# EAGLE board PFCEDU.V4 (EAGLE 9.5.0), part 1 of 2
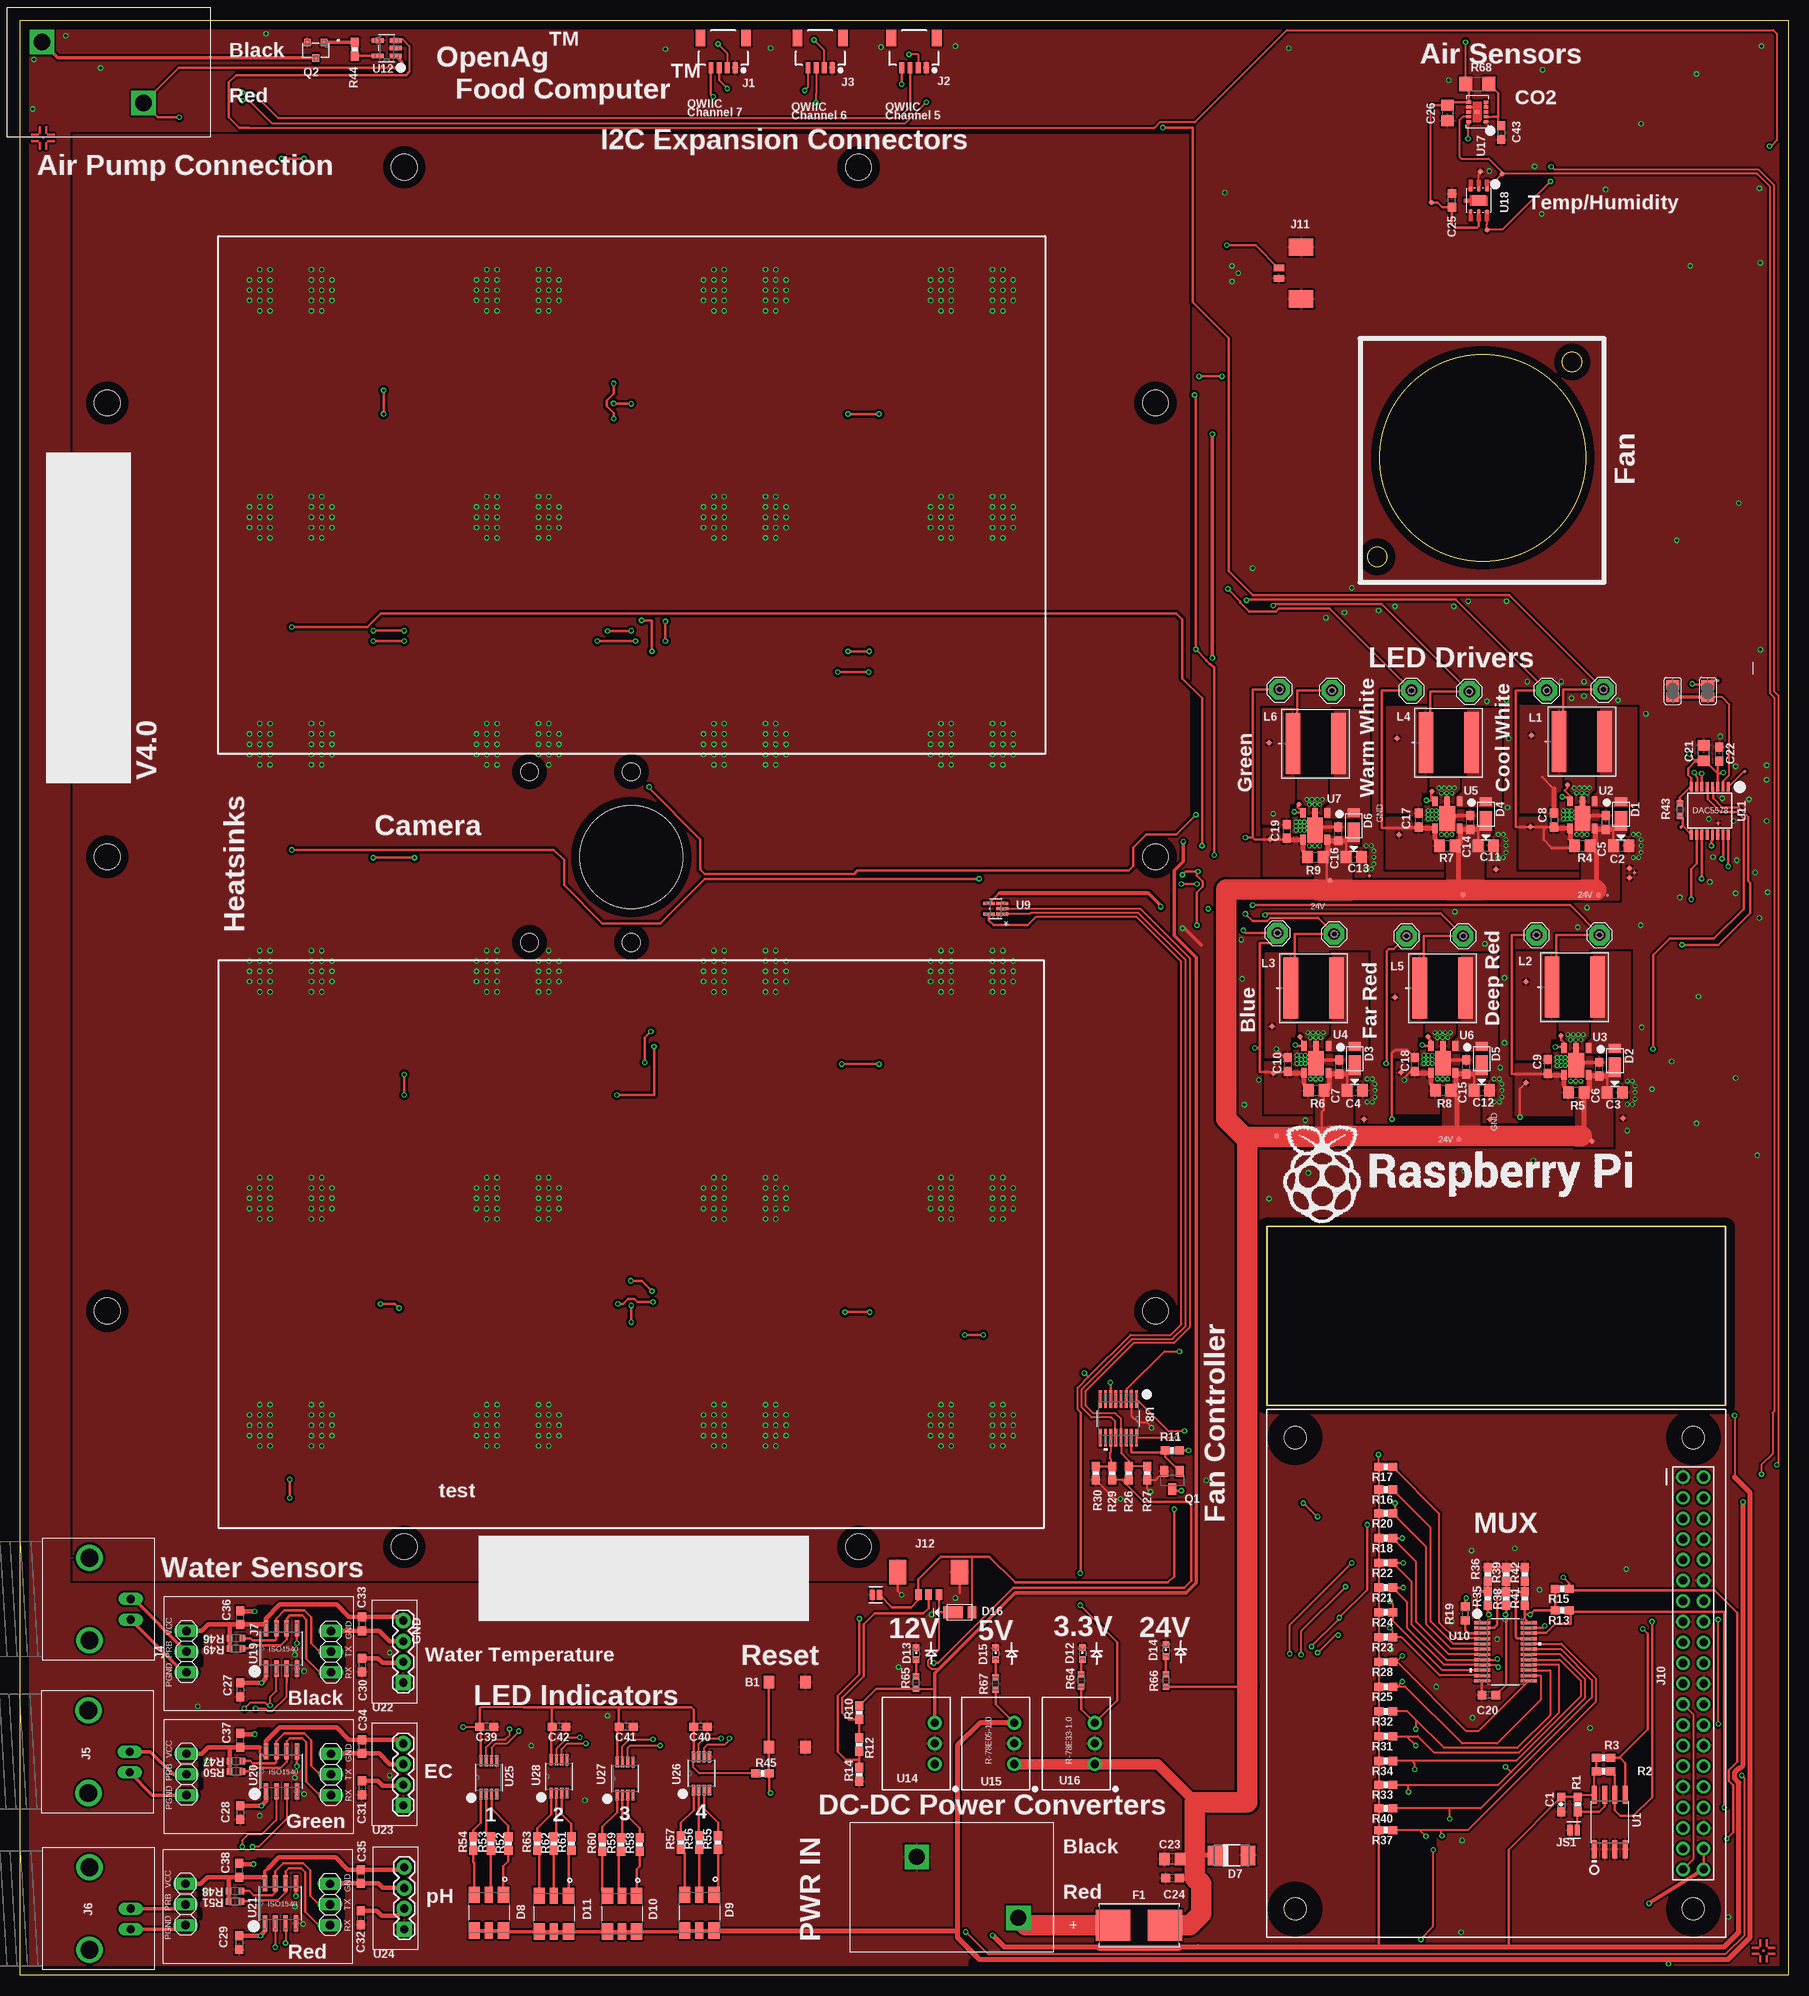
[diagram p0: board, top side]
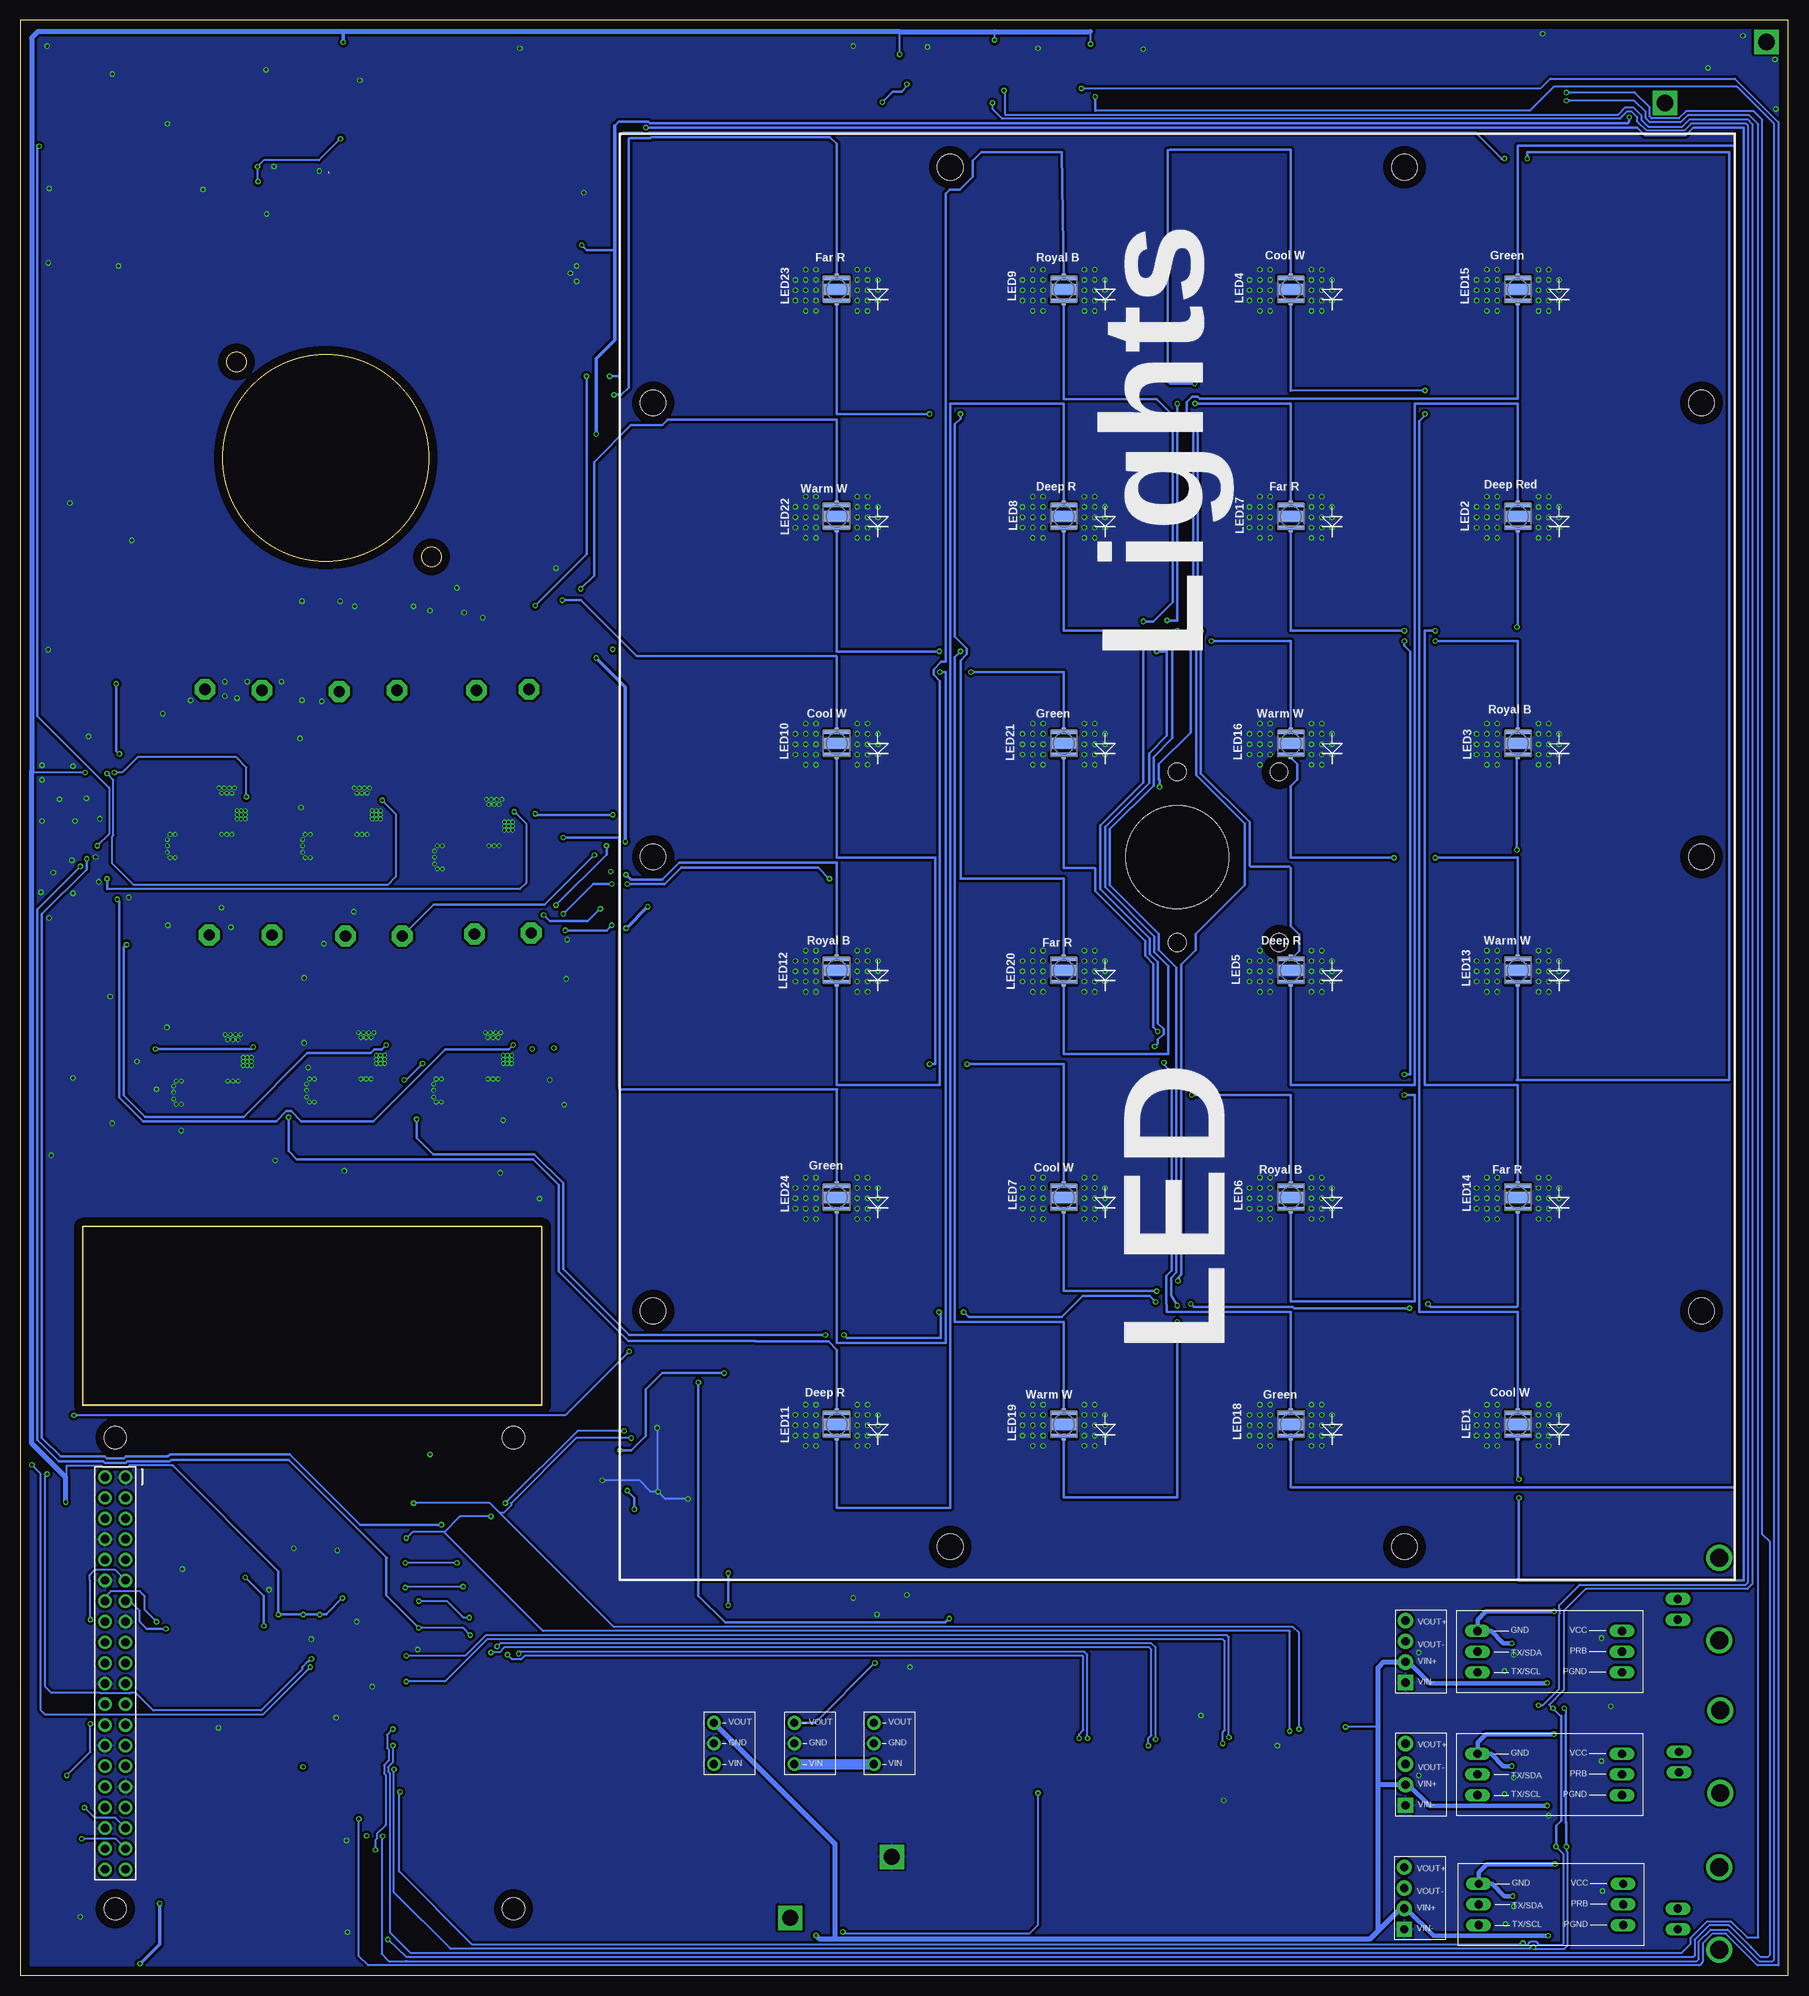
[diagram p1: board, bottom side, seen from below]

Size 217.55 x 240.61 mm. Coordinates in mm from the lower left corner, seen from the top.
Outline: 217.55,240.61 217.55,0 0,0 0,240.61 217.55,240.61
Outline: 153.42,92.15 153.42,70.18 209.8,70.18 209.8,92.15 153.42,92.15
Outline: circle at 190.95,198.56 radius 1.2
Outline: circle at 166.97,174.57 radius 1.2
Outline: circle at 179.96,186.77 radius 12.7
Copper layers (1*16): Top 0.035mm / dielectric 1.5mm / Bottom 0.035mm
Design rules "default *": minimum track width 6mil, minimum drill 0.35mm, track to track 4mil, track to pad 4mil, pad to pad 6mil, via to via 6mil, smd to smd 6mil, copper to edge 40mil, drill to drill 6mil, minimum pad ring 6mil, minimum via ring 6mil, stop-mask expansion 4mil, vias tented up to drill 25mil, thermal gap 10mil
Net classes: 0 default: width 0.102 mm, drill 0.254 mm, clearance 0.254 mm; 1 vcc: width 0.178 mm
Holes 3.17 mm at 47.24,52.73 103.12,52.73 139.67,81.76 139.67,137.64 139.67,193.52 103.12,222.53 47.24,222.53 10.69,193.52 10.69,137.64 10.69,81.76
Holes 12.7 mm at 75.18,137.62
Holes 2.2 mm at 75.19,127.12 75.19,148.12 62.67,148.12 62.67,127.12
tRestrict: 17 lines

## Footprints (pad centres in the part's own frame; a part is rotated, then mirrored left to right if it is on the bottom)
PTS645 = smd 1.55 x 1.3: P$1 -3.975,2.25; P$2 3.975,2.25; P$3 -3.975,-2.25; P$4 3.975,-2.25
CAP-0603 = smd 1.1 x 1: 1 -0.9,0; 2 0.9,0
C0805 = smd 1.3 x 1.5: 1 -0.95,0; 2 0.95,0
C0603 = smd 1.1 x 1: 1 -0.85,0; 2 0.85,0
C0603@1 = smd 1.1 x 1: 1 -0.85,0; 2 0.85,0
POWERDI123 = smd 1.05 x 1.5: + -1.3,0 | smd 2.4 x 1.5: - 1.05,0
DO-214AC = smd 1.8 x 2.4: A 2.025,0; C -2.025,0
LED_QBLP679E-RGB = smd 2 x 1.4: 1 -2.2,1.8; 3 -2.2,-1.8; 4 2.2,-1.8; 6 2.2,1.8 | smd 2 x 1: 2 -2.2,0; 5 2.2,0
CHIPLED_0603 = smd 0.8 x 0.8: A 0,-0.75; C 0,0.75
0154SERIES = smd 4.242 x 3.81: 1 -3.188,0; 2 3.188,0
1X04_1MM_RA = smd 0.6 x 1.35: 1 -1.5,0; 2 -0.5,0; 3 0.5,0; 4 1.5,0 | smd 1.2 x 2: NC1 2.8,-3.675; NC2 -2.8,-3.675
BNC-5227161 = drill 2.2: 3 -5.08,0; 4 5.08,0 | drill 1.016 long: GND -2.54,-5.08; S 0,-5.08
ATLAS-STAMP = drill 1.016 long: 1 -8.89,2.54; 2 -8.89,0; 3 -8.89,-2.54; 4 8.89,-2.54; 5 8.89,0; 6 8.89,2.54
PFCEDU_V7_PI4_AI_CONNECTORS_2X20-RPI-NOFIRST = drill 1.016 pad 1.651: 1 24.13,-1.27; 2 24.13,1.27; 3 21.59,-1.27; 4 21.59,1.27; 5 19.05,-1.27; 6 19.05,1.27; 7 16.51,-1.27; 8 16.51,1.27; 9 13.97,-1.27; 10 13.97,1.27; 11 11.43,-1.27; 12 11.43,1.27; 13 8.89,-1.27; 14 8.89,1.27; 15 6.35,-1.27; 16 6.35,1.27; 17 3.81,-1.27; 18 3.81,1.27; 19 1.27,-1.27; 20 1.27,1.27; 21 -1.27,-1.27; 22 -1.27,1.27; 23 -3.81,-1.27; 24 -3.81,1.27; 25 -6.35,-1.27; 26 -6.35,1.27; 27 -8.89,-1.27; 28 -8.89,1.27; 29 -11.43,-1.27; 30 -11.43,1.27; 31 -13.97,-1.27; 32 -13.97,1.27; 33 -16.51,-1.27; 34 -16.51,1.27; 35 -19.05,-1.27; 36 -19.05,1.27; 37 -21.59,-1.27; 38 -21.59,1.27; 39 -24.13,-1.27; 40 -24.13,1.27 | hole 2.75: -29,0; 29,0; -29,-49; 29,-49
MOLEX_2P_1.25MM = smd 0.8 x 1.3: 1 2.55,2.75; 2 3.8,2.75 | smd 2.1 x 3: 3 0,0; 4 6.35,0
MOLEX_3P_1.25MM = smd 0.8 x 1.3: 1 2.55,2.75; 2 3.8,2.75; 5 5.05,2.75 | smd 2.1 x 3: 3 0,0; 4 7.6,0
1X02-SJ-NO = smd 0.635 x 1.27: 1 -0.45,0; 2 0.45,0
IND_TAIYO_NR8040 = smd 1.791 x 7.493: 1 -2.8,0; 2 2.8,0
CREE-XLAMP-XP-E = smd 0.5 x 3.3: A 1.4,0; C -1.4,0 | smd 0.45 x 0.5: A@1 1.725,0; C@1 -1.725,0 | smd 1.3 x 3.3: THERM 0,0
SE14 = drill 1.397 pad 2.54 octagon: MP 0,0
SOT23-BEC = smd 1 x 1.4: B -0.95,-1.1; C 0,1.1; E 0.95,-1.1
SOT-23 = smd 0.813 x 0.889: 1 -1.025,-0.945; 2 1.025,-0.945; 3 0,0.945
RES-0603 = smd 1.1 x 1: 1 -0.9,0; 2 0.9,0
R0805 = smd 1.3 x 1.5: 1 -0.95,0; 2 0.95,0
0603-RES = smd 1.1 x 1: 1 -0.85,0; 2 0.85,0
R0603 = smd 1 x 1.1: 1 -0.85,0; 2 0.85,0
RC0603N = smd 0.756 x 0.8: 1 -0.778,0; 2 0.778,0
R1206 = smd 1.6 x 1.803: 1 -1.422,0; 2 1.422,0
SJ1 = smd 1.168 x 1.6: 1 -0.762,0; 2 0.762,0
TP06R = smd 0.6 x 0.6: TP 0,0
TP04R = smd 0.4 x 0.4: 1 0,0
SO08-EIAJ = smd 0.61 x 2.21: 1 -1.905,-3.378; 2 -0.635,-3.378; 3 0.635,-3.378; 4 1.905,-3.378; 5 1.905,3.353; 6 0.635,3.353; 7 -0.635,3.353; 8 -1.905,3.353
AL8861 = smd 0.68 x 1.2: 1 -1.5,-1.65; 2 0,-1.65; 3 1.5,-1.65; 4 1.5,1.65; 5 -1.5,1.65 | smd 1.93 x 3.05: 44 0,0.475
RQ_16 = smd 2.184 x 0.356: 1 -2.362,2.223; 2 -2.362,1.587; 3 -2.362,0.953; 4 -2.362,0.318; 5 -2.362,-0.318; 6 -2.362,-0.953; 7 -2.362,-1.587; 8 -2.362,-2.223; 9 2.362,-2.223; 10 2.362,-1.587; 11 2.362,-0.953; 12 2.362,-0.318; 13 2.362,0.318; 14 2.362,0.953; 15 2.362,1.587; 16 2.362,2.223
KS_5 = smd 1.46 x 0.356: 1 -0.819,0.65; 2 -0.819,0; 3 -0.819,-0.65; 4 0.819,-0.65; 5 0.819,0.65
PW24-M = smd 1.981 x 0.406: 1 -2.87,3.575; 2 -2.87,2.925; 3 -2.87,2.275; 4 -2.87,1.625; 5 -2.87,0.975; 6 -2.87,0.325; 7 -2.87,-0.325; 8 -2.87,-0.975; 9 -2.87,-1.625; 10 -2.87,-2.275; 11 -2.87,-2.925; 12 -2.87,-3.575; 13 2.87,-3.575; 14 2.87,-2.925; 15 2.87,-2.275; 16 2.87,-1.625; 17 2.87,-0.975; 18 2.87,-0.325; 19 2.87,0.325; 20 2.87,0.975; 21 2.87,1.625; 22 2.87,2.275; 23 2.87,2.925; 24 2.87,3.575
TSSOP16 = smd 0.35 x 1.2: 1 -2.275,-2.925; 2 -1.625,-2.925; 3 -0.975,-2.925; 4 -0.325,-2.925; 5 0.325,-2.925; 6 0.975,-2.925; 7 1.625,-2.925; 8 2.275,-2.925; 9 2.275,2.925; 10 1.625,2.925; 11 0.975,2.925; 12 0.325,2.925; 13 -0.325,2.925; 14 -0.975,2.925; 15 -1.625,2.925; 16 -2.275,2.925
DBV5 = smd 1.473 x 0.559: 1 -1.118,0.95; 2 -1.118,0; 3 -1.118,-0.95; 4 1.118,-0.95; 5 1.118,0.95
R-78E5.0-1.0 = drill 1 pad 1.676: 1 -2.54,0; 2 0,0; 3 2.54,0
CCS811 = smd 0.6 x 0.4: 1 -1.05,1.2; 2 -1.05,0.6; 3 -1.05,0; 4 -1.05,-0.6; 5 -1.05,-1.2; 6 1.05,-1.2; 7 1.05,-0.6; 8 1.05,0; 9 1.05,0.6; 10 1.05,1.2; EP 0,0
SHT2X = smd 0.3 x 0.4: 1 -1,-1.4; 2 0,-1.4; 3 1,-1.4; 4 1,1.4; 5 0,1.4; 6 -1,1.4 | smd 1.651 x 1.27: 7 0,0
D8 = smd 1.981 x 0.559: 1 -2.464,1.905; 2 -2.464,0.635; 3 -2.464,-0.635; 4 -2.464,-1.905; 5 2.464,-1.905; 6 2.464,-0.635; 7 2.464,0.635; 8 2.464,1.905
RM3.33.3S-SIP4 = drill 1.016 pad 1.88 square: 1 0,0 | drill 1.016 pad 1.88: 2 2.54,0; 3 5.08,0; 4 7.62,0
SOT505-1-L = smd 1.321 x 0.457: 1 -2.045,0.975; 2 -2.045,0.325; 3 -2.045,-0.325; 4 -2.045,-0.975; 5 2.045,-0.975; 6 2.045,-0.325; 7 2.045,0.325; 8 2.045,0.975
PHOENIX_2P = drill 2 square: 1 0,0; 2 7.5,12.5

## Placement (x,y rotation side)
A1  PTS645  [PTS645]  94.36,32.08 90 top
C1  0.1uF  [CAP-0603]  189.61,21.03 270 top
C2  10uF  [C0805]  196.98,139.01 0 top
C3  10uF  [C0805]  196.22,108.66 0 top
C4  10uF  [C0805]  164.21,108.92 0 top
C5  0.1uF  [C0603]  195.07,141.87 90 top
C6  0.1uF  [C0603]  194.31,111.52 90 top
C7  0.1uF  [C0603]  162.31,111.77 90 top
C8  0.1uF  [C0603]  188.72,142.19 270 top
C9  0.1uF  [C0603]  187.96,111.84 270 top
C10  0.1uF  [C0603]  155.96,112.09 270 top
C11  10uF  [C0805]  180.34,139.01 0 top
C12  10uF  [C0805]  179.83,108.92 0 top
C13  10uF  [C0805]  164.08,137.62 0 top
C14  0.1uF  [C0603]  178.44,141.87 90 top
C15  0.1uF  [C0603]  177.93,111.77 90 top
C16  0.1uF  [C0603]  162.18,140.47 90 top
C17  0.1uF  [C0603]  172.09,142.19 270 top
C18  0.1uF  [C0603]  171.58,112.09 270 top
C19  0.1uF  [C0603]  155.83,140.79 270 top
C20  .1uF  [C0603@1]  180.71,34.49 180 top
C21  4.7uF  [C0805]  207.14,150.44 90 top
C22  0.1uF  [C0603]  209.04,150.32 90 top
C23  4.7uF  [C0805]  141.73,14.3 180 top
C24  .1uF  [C0603@1]  141.77,11.96 180 top
C25  0.1uF  [C0603]  176.17,218.45 90 top
C26  4.7uF  [C0805]  175.62,229.21 270 top
C27  0.1uF  [C0603]  27.05,35.13 270 top
C28  0.1uF  [C0603]  27.05,20.02 270 top
C29  0.1uF  [C0603]  26.92,4.01 270 top
C30  0.1uF  [C0603]  42.04,38.18 270 top
C31  0.1uF  [C0603]  42.04,23.06 270 top
C32  0.1uF  [C0603]  41.91,7.06 270 top
C33  0.1uF  [C0603]  42.04,43.26 270 top
C34  0.1uF  [C0603]  42.04,28.14 270 top
C35  0.1uF  [C0603]  41.91,12.14 270 top
C36  0.1uF  [C0603]  27.05,44.02 90 top
C37  0.1uF  [C0603]  27.05,28.91 90 top
C38  0.1uF  [C0603]  26.92,12.9 90 top
C39  0.1uF  [C0603]  57.4,30.56 180 top
C40  0.1uF  [C0603]  83.69,30.56 180 top
C41  0.1uF  [C0603]  74.55,30.56 180 top
C42  0.1uF  [C0603]  66.29,30.56 180 top
C43  0.1uF  [C0603]  182.22,226.8 270 top
D1  SBR2A40P1-7  [POWERDI123]  196.98,143.14 270 top
D2  SBR2A40P1-7  [POWERDI123]  196.22,112.79 270 top
D3  SBR2A40P1-7  [POWERDI123]  164.21,113.04 270 top
D4  SBR2A40P1-7  [POWERDI123]  180.34,143.14 270 top
D5  SBR2A40P1-7  [POWERDI123]  179.83,113.04 270 top
D6  SBR2A40P1-7  [POWERDI123]  164.08,141.74 270 top
D7  SMAJ14A  [DO-214AC]  149.06,14.74 0 top
D8  QBLP679E-RGB  [LED_QBLP679E-RGB]  57.66,7.7 270 top
D9  QBLP679E-RGB  [LED_QBLP679E-RGB]  83.57,7.7 270 top
D10  QBLP679E-RGB  [LED_QBLP679E-RGB]  74.04,7.57 270 top
D11  QBLP679E-RGB  [LED_QBLP679E-RGB]  65.66,7.57 270 top
D12  APT1608  [CHIPLED_0603]  130.68,39.57 0 top
D13  APT1608  [CHIPLED_0603]  110.24,39.57 0 top
D14  APT1608  [CHIPLED_0603]  140.96,39.95 0 top
D15  APT1608  [CHIPLED_0603]  120.02,39.57 0 top
D16  SBR2A40P1-7  [POWERDI123]  115.82,44.65 180 top
DRILEGEND  [DRILEGEND]  -20.33,-8.46 0 top  (outside the outline)
F1  0154005.DR  [0154SERIES]  137.67,6.17 0 top
J1  Qwiic Right Angle  [1X04_1MM_RA]  86.49,234.77 180 top
J2  Qwiic Right Angle  [1X04_1MM_RA]  109.98,234.77 180 top
J3  Qwiic Right Angle  [1X04_1MM_RA]  98.42,234.77 180 top
J4  5227161-9  [BNC-5227161]  8.51,46.3 90 top
J5  5227161-9  [BNC-5227161]  8.38,27.51 90 top
J6  5227161-9  [BNC-5227161]  8.51,8.2 90 top
J7  ATLAS-STAMP  [ATLAS-STAMP]  29.34,39.83 180 top
J8  ATLAS-STAMP  [ATLAS-STAMP]  29.34,24.71 180 top
J9  ATLAS-STAMP  [ATLAS-STAMP]  29.21,8.71 180 top
J10  PFCEDU_V7_PI4_AI_CONNECTORS_2X20-RPI-NOFIRST  [PFCEDU_V7_PI4_AI_CONNECTORS_2X20-RPI-NOFIRST]  205.87,37.16 270 top
J11  MOLEX_2P_1.25MM  [MOLEX_2P_1.25MM]  157.61,206.32 90 top
J12  MOLEX_3P_1.25MM  [MOLEX_3P_1.25MM]  115.57,49.61 180 top
JS1  1X02-SJ-NO  [1X02-SJ-NO]  191.13,17.86 0 top
JS2  1X02-SJ-NO  [1X02-SJ-NO]  105.28,46.81 180 top
L1  NR8040T101M  [IND_TAIYO_NR8040]  192.15,151.84 0 top
L2  NR8040T101M  [IND_TAIYO_NR8040]  191.26,121.62 0 top
L3  NR8040T101M  [IND_TAIYO_NR8040]  159.13,121.49 0 top
L4  NR8040T101M  [IND_TAIYO_NR8040]  175.77,151.71 0 top
L5  NR8040T101M  [IND_TAIYO_NR8040]  175.01,121.49 0 top
L6  NR8040T101M  [IND_TAIYO_NR8040]  159.38,151.59 0 top
LED1  XP-E  [CREE-XLAMP-XP-E]  33.27,67.79 90 bottom
LED2  XP-E  [CREE-XLAMP-XP-E]  33.27,179.55 90 bottom
LED3  XP-E  [CREE-XLAMP-XP-E]  33.27,151.61 90 bottom
LED4  XP-E  [CREE-XLAMP-XP-E]  61.21,207.49 90 bottom
LED5  XP-E  [CREE-XLAMP-XP-E]  61.21,123.67 90 bottom
LED6  XP-E  [CREE-XLAMP-XP-E]  61.21,95.73 90 bottom
LED7  XP-E  [CREE-XLAMP-XP-E]  89.15,95.73 90 bottom
LED8  XP-E  [CREE-XLAMP-XP-E]  89.15,179.55 90 bottom
LED9  XP-E  [CREE-XLAMP-XP-E]  89.15,207.49 90 bottom
LED10  XP-E  [CREE-XLAMP-XP-E]  117.09,151.61 90 bottom
LED11  XP-E  [CREE-XLAMP-XP-E]  117.09,67.79 90 bottom
LED12  XP-E  [CREE-XLAMP-XP-E]  117.09,123.67 90 bottom
LED13  XP-E  [CREE-XLAMP-XP-E]  33.27,123.67 90 bottom
LED14  XP-E  [CREE-XLAMP-XP-E]  33.27,95.73 90 bottom
LED15  XP-E  [CREE-XLAMP-XP-E]  33.27,207.49 90 bottom
LED16  XP-E  [CREE-XLAMP-XP-E]  61.21,151.61 90 bottom
LED17  XP-E  [CREE-XLAMP-XP-E]  61.21,179.55 90 bottom
LED18  XP-E  [CREE-XLAMP-XP-E]  61.21,67.79 90 bottom
LED19  XP-E  [CREE-XLAMP-XP-E]  89.15,67.79 90 bottom
LED20  XP-E  [CREE-XLAMP-XP-E]  89.15,123.67 90 bottom
LED21  XP-E  [CREE-XLAMP-XP-E]  89.15,151.61 90 bottom
LED22  XP-E  [CREE-XLAMP-XP-E]  117.09,179.55 90 bottom
LED23  XP-E  [CREE-XLAMP-XP-E]  117.09,207.49 90 bottom
LED24  XP-E  [CREE-XLAMP-XP-E]  117.09,95.73 90 bottom
LSP1  SE14  [SE14]  187.83,158.13 90 top
LSP2  SE14  [SE14]  194.82,158.25 90 top
LSP3  SE14  [SE14]  186.56,128.03 90 top
LSP4  SE14  [SE14]  194.31,128.03 90 top
LSP5  SE14  [SE14]  154.69,128.28 90 top
LSP6  SE14  [SE14]  161.67,128.16 90 top
LSP7  SE14  [SE14]  171.2,158.13 90 top
LSP8  SE14  [SE14]  178.31,158 90 top
LSP9  SE14  [SE14]  170.56,127.9 90 top
LSP10  SE14  [SE14]  177.55,127.9 90 top
LSP11  SE14  [SE14]  154.94,158.25 90 top
LSP12  SE14  [SE14]  161.42,158.13 90 top
Q1  MMBT2222A  [SOT23-BEC]  141.73,60.91 180 top
Q2  BSS138K  [SOT-23]  36.35,236.93 180 top
R1  1K  [RES-0603]  191.64,21.03 90 top
R2  2.2kΩ  [RES-0603]  194.82,25.1 180 top
R3  2.2KΩ  [RES-0603]  194.82,26.75 180 top
R4  6.34 ohm  [R0805]  192.21,139.01 0 top
R5  6.34 ohm  [R0805]  191.45,108.66 0 top
R6  6.34 ohm  [R0805]  159.45,108.92 0 top
R7  6.34 ohm  [R0805]  175.58,139.01 0 top
R8  6.34 ohm  [R0805]  175.07,108.92 0 top
R9  6.34 ohm  [R0805]  159.32,137.62 0 top
R10  10k  [0603-RES]  103.25,32.33 90 top
R11  4.7KΩ  [0603-RES]  141.73,64.59 0 top
R12  10k  [0603-RES]  103.25,28.4 270 top
R13  2.2K  [0603-RES]  189.73,44.92 180 top
R14  4.7KΩ  [0603-RES]  103.25,24.71 90 top
R15  2.2k  [0603-RES]  189.73,47.57 180 top
R16  2.2k  [0603-RES]  168.02,59.77 180 top
R17  2.2k  [0603-RES]  168.02,62.56 180 top
R18  2.2k  [0603-RES]  168.02,53.8 180 top
R19  10K  [R0603]  177.79,44.52 90 top
R20  2.2k  [0603-RES]  168.02,56.85 180 top
R21  2.2k  [0603-RES]  168.02,47.7 180 top
R22  2.2k  [0603-RES]  168.02,50.75 180 top
R23  2.2k  [0603-RES]  168.02,41.61 180 top
R24  2.2k  [0603-RES]  168.02,44.65 180 top
R25  2.2k  [0603-RES]  168.02,35.51 180 top
R26  10k  [0603-RES]  136.4,61.8 90 top
R27  10k  [0603-RES]  138.68,61.8 270 top
R28  2.2k  [0603-RES]  168.02,38.56 180 top
R29  10k  [0603-RES]  134.37,61.8 90 top
R30  10k  [0603-RES]  132.33,61.8 270 top
R31  2.2k  [0603-RES]  168.02,29.41 180 top
R32  2.2k  [0603-RES]  168.02,32.46 180 top
R33  2.2k  [0603-RES]  168.02,23.44 180 top
R34  2.2k  [0603-RES]  168.02,26.37 180 top
R35  10K  [0603-RES]  180.56,46.37 270 top
R36  NP  [0603-RES]  180.56,49.34 270 top
R37  2.2k  [0603-RES]  168.02,17.86 180 top
R38  10K  [0603-RES]  182.82,46.35 270 top
R39  NP  [0603-RES]  182.82,49.34 270 top
R40  2.2k  [0603-RES]  168.02,20.52 180 top
R41  10K  [0603-RES]  185.1,46.35 270 top
R42  NP  [0603-RES]  185.1,49.34 270 top
R43  1K  [RC0603N]  204.22,143.46 270 top
R44  10  [0603-RES]  41.15,237.06 90 top
R45  10k  [0603-RES]  91.31,24.84 0 top
R46  2.2KΩ  [RC0603N]  26.54,41.48 180 top
R47  2.2KΩ  [RC0603N]  26.54,26.37 180 top
R48  2.2KΩ  [RC0603N]  26.42,10.36 180 top
R49  2.2KΩ  [RC0603N]  26.54,40.21 180 top
R50  2.2KΩ  [RC0603N]  26.54,25.1 180 top
R51  2.2KΩ  [RC0603N]  26.42,9.09 180 top
R52  240  [0603-RES]  60.07,16.21 90 top
R53  240  [0603-RES]  57.91,16.21 90 top
R54  240  [0603-RES]  55.75,16.21 90 top
R55  240  [0603-RES]  85.85,16.33 90 top
R56  240  [0603-RES]  83.57,16.33 90 top
R57  240  [0603-RES]  81.28,16.33 90 top
R58  240  [0603-RES]  76.2,16.08 90 top
R59  240  [0603-RES]  73.91,16.08 90 top
R60  240  [0603-RES]  71.63,16.08 90 top
R61  240  [0603-RES]  67.82,16.21 90 top
R62  240  [0603-RES]  65.66,16.21 90 top
R63  240  [0603-RES]  63.63,16.21 90 top
R64  160  [RC0603N]  130.55,36.26 270 top
R65  600  [RC0603N]  110.24,36.02 270 top
R66  1200  [RC0603N]  140.96,36.26 270 top
R67  260  [RC0603N]  120,35.88 270 top
R68  10K  [R1206]  179.3,232.77 180 top
SJ1  [SJ1]  207.65,158.06 270 top
SJ2  [SJ1]  203.33,158.06 270 top
TP38  TPTP06R  [TP06R]  182.34,221.73 0 top
TP39  TPTP06R  [TP06R]  180.48,214.82 0 top
TP40  TPTP06R  [TP06R]  179.67,221.98 0 top
TP41  TPTP06R  [TP06R]  173.63,218.2 0 top
TP99  TPTP04R  [TP04R]  195.33,132.92 90 top
TP100  TPTP04R  [TP04R]  208.91,159.33 270 top
TP101  TPTP04R  [TP04R]  208.91,141.81 180 top
TP104  TPTP04R  [TP04R]  212.22,148.16 0 top
TP105  TPTP04R  [TP04R]  204.34,141.3 0 top
TP106  TPTP04R  [TP04R]  198.63,135.71 0 top
TP107  TPTP04R  [TP04R]  165.99,135.33 180 top
TP112  TPTP06R  [TP06R]  185.93,152.6 0 top
TP113  TPTP06R  [TP06R]  194.18,132.98 0 top
TP114  TPTP06R  [TP06R]  197.99,135.08 0 top
TP115  TPTP06R  [TP06R]  185.8,141.36 90 top
TP116  TPTP06R  [TP06R]  190.37,146.51 90 top
TP117  TPTP06R  [TP06R]  169.42,152.22 0 top
TP118  TPTP06R  [TP06R]  177.55,132.98 0 top
TP119  TPTP06R  [TP06R]  197.99,136.22 0 top
TP120  TPTP06R  [TP06R]  169.67,140.35 90 top
TP121  TPTP06R  [TP06R]  173.74,145.75 90 top
TP122  TPTP06R  [TP06R]  185.29,122.25 0 top
TP123  TPTP06R  [TP06R]  193.42,102.63 0 top
TP124  TPTP06R  [TP06R]  181.61,136.09 0 top
TP125  TPTP06R  [TP06R]  185.29,109.87 90 top
TP126  TPTP06R  [TP06R]  189.61,115.65 90 top
TP127  TPTP06R  [TP06R]  169.16,120.35 0 top
TP128  TPTP06R  [TP06R]  177.04,102.88 0 top
TP129  TPTP06R  [TP06R]  197.23,105.49 0 top
TP130  TPTP06R  [TP06R]  169.93,111.14 90 top
TP131  TPTP06R  [TP06R]  173.23,115.52 90 top
TP132  TPTP06R  [TP06R]  154.05,116.79 0 top
TP133  TPTP06R  [TP06R]  154.56,103.26 0 top
TP134  TPTP06R  [TP06R]  180.85,105.36 0 top
TP135  TPTP06R  [TP06R]  154.18,111.01 90 top
TP136  TPTP06R  [TP06R]  157.48,115.52 90 top
TP137  TPTP06R  [TP06R]  153.67,151.71 0 top
TP138  TPTP06R  [TP06R]  161.16,134.76 0 top
TP139  TPTP06R  [TP06R]  165.35,105.36 0 top
TP140  TPTP06R  [TP06R]  153.8,139.84 90 top
TP141  TPTP06R  [TP06R]  157.35,144.09 90 top
U1  24LC32A  [SO08-EIAJ]  195.58,18.87 0 top
U2  AL8861  [AL8861]  192.21,142.82 180 top
U3  AL8861  [AL8861]  191.45,112.47 180 top
U4  AL8861  [AL8861]  159.45,112.73 180 top
U5  AL8861  [AL8861]  175.58,142.82 180 top
U6  AL8861  [AL8861]  175.07,112.73 180 top
U7  AL8861  [AL8861]  159.32,141.43 180 top
U8  ADT7470ARQZ-REEL  [RQ_16]  135.13,68.53 270 top
U9  TMP05AKSZ-500RL7  [KS_5]  120.02,131.27 180 top
U10  TCA9548APWRPW24-M  [PW24-M]  182.74,39.82 0 top
U11  DAC5578  [TSSOP16]  207.9,143.33 180 top
U12  UCC27517DBVR  [DBV5]  45.09,237.19 180 top
U14  R-78E12-1.0  [R-78E5.0-1.0]  112.52,28.52 90 top
U15  R-78E05-1.0  [R-78E5.0-1.0]  122.3,28.52 90 top
U16  R-78E33-1.0  [R-78E5.0-1.0]  132.21,28.52 90 top
U17  CCS811  [CCS811]  179.3,229.34 180 top
U18  SHT25  [SHT2X]  179.47,218.45 180 top
U19  ISO1540  [D8]  32.13,40.21 90 top
U20  ISO1540  [D8]  32.13,25.1 90 top
U21  ISO1540  [D8]  32,8.84 90 top
U22  RM-3.33.3S  [RM3.33.3S-SIP4]  47.12,36.02 90 top
U23  RM-3.33.3S  [RM3.33.3S-SIP4]  47.12,20.9 90 top
U24  RM-3.33.3S  [RM3.33.3S-SIP4]  47.24,5.66 90 top
U25  PCA9633DP1SOT505-1-L  [SOT505-1-L]  57.66,24.33 90 top
U26  PCA9633DP1SOT505-1-L  [SOT505-1-L]  83.82,24.84 90 top
U27  PCA9633DP1SOT505-1-L  [SOT505-1-L]  74.42,24.21 90 top
U28  PCA9633DP1SOT505-1-L  [SOT505-1-L]  66.29,24.46 90 top
U$1  [PASSER-CIRCLE]  2.79,226.14 0 top
U$2  [PASSER-CIRCLE]  214.5,3 180 top
W11  PHOENIX_2P  [PHOENIX_2P]  2.67,237.95 270 top
W12  PHOENIX_2P  [PHOENIX_2P]  122.81,7.06 90 top

## Library data of the parts
A1 J11 J12 W11 W12 = openag-connectors
C1 = Ai_Passives; DIELECTRIC: X7R
C2-C4 C11-C13 = openag-capacitors; MANUFACTURER: Taiyo Yuden; MPN: GMK212BBJ106KG-T; VENDOR: Digikey; VLINK: https://www.digikey.com/product-detail/en/taiyo-yuden/GMK212BBJ106KG-T/587-4893-1-ND/6563736; VPN: 587-4893-1-ND
C5-C10 C14-C19 C22 C25 C27-C42 = openag-capacitors; MANUFACTURER: Kemet; MPN: C0603C104K5RACTU; VENDOR: Digikey; VLINK: https://www.digikey.com/product-detail/en/kemet/C0603C104K5RACTU/399-5089-1-ND/1465623; VPN: 399-5089-1-ND
C20 C24 = rcl
C21 C23 = openag-capacitors; MANUFACTURER: Samsung; MPN: CL21A475KBQNNNE; VENDOR: Digikey; VLINK: https://www.digikey.com/product-detail/en/samsung-electro-mechanics/CL21A475KBQNNNE/1276-1248-1-ND/3889334; VPN: 1276-1248-1-ND
C26 C43 = openag-capacitors; POPULATE: YES; VERIFIED: NO
D1-D6 D16 = openag-diodes; MANUFACTURER: Diodes Incorporated; MPN: SBR2A40P1-7; VENDOR: Digikey; VLINK: https://www.digikey.com/product-detail/en/diodes-incorporated/SBR2A40P1-7/SBR2A40P1DITR-ND/1681825; VPN: SBR2A40P1DITR-ND
D7 = openag-diodes; POPULATE: YES; VERIFIED: NO
D8-D11 = QBLP679E-RGB; DESCRIPTION: Led Rgb Diffused 6smd; DIGI-KEY_PART_NUMBER: 1516-1131-1-ND; DIGI-KEY_PURCHASE_URL: https://www.digikey.com/product-detail/en/qt-brightek-qtb/QBLP679E-RGB/1516-1131-1-ND/4814858?utm_source=snapeda&utm_medium=aggregator&utm_campaign=symbol; MF: QT Brightek; MP: QBLP679E-RGB; PACKAGE: PLCC-6 QT Brightek
D12-D15 = openag-diodes; MANUFACTURER: Kingbright; MPN: APT1608CGCK; VENDOR: Digikey; VLINK: https://www.digikey.com/product-detail/en/kingbright/APT1608CGCK/754-1116-1-ND/1747833#; VPN: 754-1116-1-ND
DRILEGEND = drilegend
F1 = openag-fuses; MANUFACTURER_PART_NUMBER: 0154005.DR; VENDOR: Littelfuse Inc
J1-J3 = SparkFun-Connectors; PROD_ID: CONN-13694
J4-J6 = openag-connectors; MANUFACTURER: TE Connectivity AMP Connectors; MPN: 5227161-9; VENDOR: Digikey; VLINK: https://www.digikey.com/product-detail/en/te-connectivity-amp-connectors/5227161-9/A32261-ND/811159; VPN: A32261-ND
J7-J9 SJ1 SJ2 = openag-connectors; MPN: N/A
J10 = PFC_pi4
JS1 JS2 = Ai_Connectors
L1-L6 = openag-inductors; MANUFACTURER_PART_NUMBER: NR8040T101M; VENDOR: TAIYO YUDEN
LED1-LED24 = Tomaszewski
LSP1-LSP12 = solpad
Q1 = transistor-npn
Q2 = openag-driver-IC; MANUFACTURER_PART_NUMBER: DMN6140L13; VENDOR: Diodes Inc
R1-R3 = Ai_Passives; TOLERANCE: 5%
R4-R9 R68 = openag-resistors; POPULATE: YES; VERIFIED: NO
R10-R18 R20-R42 R44 R45 R52-R63 = SparkFun-Resistors; PROD_ID: RES-00824
R19 = rcl; SPICEPREFIX: R
R43 R49-R51 = openag-resistors; MANUFACTURER: Panasonic; MPN: P20283CT-ND; VENDOR: Digikey; VLINK: https://www.digikey.com/product-detail/en/panasonic-electronic-components/ERJ-PB3D1001V/P20283CT-ND/6214538; VPN: P20283CT-ND
R46-R48 = openag-resistors; MANUFACTURER: Panasonic; MPN: P20283CT-ND; VALUE: 1K; VENDOR: Digikey; VLINK: https://www.digikey.com/product-detail/en/panasonic-electronic-components/ERJ-PB3D1001V/P20283CT-ND/6214538; VPN: P20283CT-ND
R64-R67 = openag-resistors; MANUFACTURER: Yageo; MPN: RC0603JR-07100RL; VENDOR: Digikey; VLINK: https://www.digikey.com/product-detail/en/yageo/RC0603JR-07100RL/311-100GRCT-ND/729644; VPN: 311-100GRCT-ND
TP38-TP41 TP99-TP101 TP104-TP107 TP112-TP141 = openag-testpads; MPN: N/A
U1 = Ai_IC
U2-U7 = openag-driver-IC
U8 = openag-driver-IC; MANUFACTURER_PART_NUMBER: ADT7470ARQZREEL; VENDOR: Analog Devices Inc
U9 = openag-sensors; MANUFACTURER_PART_NUMBER: TMP05AKSZ500RL7; VENDOR: Analog Devices Inc
U10 = OpenAG_I2C; MANUFACTURER_PART_NUMBER: TCA9548APWR; VENDOR: TEXAS INSTRUMENTS
U11 = openag-dacs; MANUFACTURER: Texas Instruments; MPN: DAC5578SPW; VENDOR: Digikey; VLINK: https://www.digikey.com/product-detail/en/texas-instruments/DAC5578SPW/296-27736-5-ND/2360827; VPN: 296-27736-5-ND
U12 = openag-driver-IC; MANUFACTURER_PART_NUMBER: UCC27517DBVR; VENDOR: Texas Instruments
U14-U16 = openag-regulators; MANUFACTURER: Recom Power; MPN: R-78E5.0-1.0; VENDOR: Digikey; VLINK: https://www.digikey.com/product-detail/en/recom-power/R-78E5.0-1.0/945-2201-ND/4930585; VPN: 945-2201-ND
U17 = openag-sensors; POPULATE: YES; VERIFIED: NO
U18 = openag-sensors; MANUFACTURER: Sensirion AG; MPN: SHT25; VENDOR: Digikey; VLINK: https://www.digikey.com/product-detail/en/sensirion-ag/SHT25/1649-1008-1-ND/5872290; VPN: 1649-1008-1-ND
U19-U21 = openag-isolators; MANUFACTURER: Texas Instruments; MPN: ISO1540DR; VENDOR: Digikey; VLINK: https://www.digikey.com/product-detail/en/texas-instruments/ISO1540DR/296-34871-1-ND/3587214; VPN: 296-34871-1-ND
U22-U24 = openag-isolators; MANUFACTURER: Recom Power; MPN: RM-3.33.3S; VENDOR: Digikey; VLINK: https://www.digikey.com/product-detail/en/recom-power/RM-3.33.3S/945-1212-ND/2256392; VPN: 945-1212-ND
U25-U28 = openag-driver-IC; MANUFACTURER_PART_NUMBER: PCA9633DP1; VENDOR: NXP
U$1 U$2 = marks

## Nets
24V_IN: F1.1 W12.1
!LDAC!: TP104.1 U11.1
#4: J10.7
#6: J10.31
#12: J10.32
#13: J10.33
#16: J10.36
#17: J10.11
#18: J10.12
#19: J10.35
#20: J10.38
#21: J10.40
#22: J10.15
#25: J10.22
#27: J10.13
+3V3: C1.1 C20.1 C21.1 C22.1 C25.1 C26.1 C27.1 C28.1 C29.1 C30.1 C31.1 C32.1 C39.2 C40.2 C41.2 C42.2 J1.2 J2.2 J3.2 R1.2 R2.2 R3.2 R11.2 R13.2 R15.2 R16.2 R17.2 R18.2 R19.2 R20.2 R21.2 R22.2 R23.2 R24.2 R25.2 R28.2 R31.2 R32.2 R33.2 R34.2 R35.2 R37.2 R38.2 R40.2 R41.2 R43.1 R45.1 R64.2 R68.2 SJ1.1 TP41.TP TP100.1 U1.8 U9.5 U10.24 U11.3 U11.8 U16.3 U17.6 U18.5 U19.1 U20.1 U21.1 U22.2 U23.2 U24.2 U25.8 U26.8 U27.8 U28.8
+5V: D8.4 D8.5 D8.6 D9.4 D9.5 D9.6 D10.4 D10.5 D10.6 D11.4 D11.5 D11.6 J10.2 J10.4 R26.1 R29.1 R67.2 U8.3 U15.3
+12V: D16.- J11.2 J12.1 R10.2 R65.2 U12.1 U14.3 W11.2
+24V: C2.1 C3.1 C4.1 C5.1 C6.1 C7.1 C11.1 C12.1 C13.1 C14.1 C15.1 C16.1 C23.1 C24.1 D1.- D2.- D3.- D4.- D5.- D6.- D7.C F1.2 R4.2 R5.2 R6.2 R7.2 R8.2 R9.2 R66.2 TP99.1 TP113.TP TP118.TP TP123.TP TP128.TP TP133.TP TP138.TP U2.5 U3.5 U4.5 U5.5 U6.5 U7.5 U14.1 U15.1 U16.1
A0_EXT_1: R35.1 R36.2 U10.1
A1_EXT_1: R38.1 R39.2 U10.2
A2_EXT_1: R41.1 R42.2 U10.21
ADDR0: SJ1.2 SJ2.2 U11.2
BUTTON: A1.P$1 A1.P$2 J10.29 R45.2
CE0: J10.24
CE1: J10.26
CH1+: C8.2 LED10.A LED10.A@1 LSP1.MP R4.1 TP115.TP U2.4
CH1-: C8.1 L1.1 LED1.C LED1.C@1 LSP2.MP TP112.TP
CH2+: C17.2 LED22.A LED22.A@1 LSP7.MP R7.1 TP120.TP U5.4
CH2-: C17.1 L4.1 LED13.C LED13.C@1 LSP8.MP TP117.TP
CH3+: C9.2 LED11.A LED11.A@1 LSP3.MP R5.1 TP125.TP U3.4
CH3-: C9.1 L2.1 LED2.C LED2.C@1 LSP4.MP TP122.TP
CH4+: C18.2 LED23.A LED23.A@1 LSP9.MP R8.1 TP130.TP U6.4
CH4-: C18.1 L5.1 LED14.C LED14.C@1 LSP10.MP TP127.TP
CH5+: C10.2 LED12.A LED12.A@1 LSP5.MP R6.1 TP135.TP U4.4
CH5-: C10.1 L3.1 LED3.C LED3.C@1 LSP6.MP TP132.TP
CH6+: C19.2 LED24.A LED24.A@1 LSP11.MP R9.1 TP140.TP U7.4
CH6-: C19.1 L6.1 LED15.C LED15.C@1 LSP12.MP TP137.TP
DAC_!CLR!: R43.2 TP105.1 U11.9
F1_PWM: Q1.B R11.1 U8.15
FAN_NEG: D16.+ J12.5 JS2.1 Q1.C
GATE: Q2.1 R44.2
GND: A1.P$3 A1.P$4 C1.2 C2.2 C3.2 C4.2 C5.2 C6.2 C7.2 C11.2 C12.2 C13.2 C14.2 C15.2 C16.2 C20.2 C21.2 C22.2 C23.2 C24.2 C25.2 C26.2 C27.2 C28.2 C29.2 C30.2 C31.2 C32.2 C39.1 C40.1 C41.1 C42.1 C43.2 D7.A D12.C D13.C D14.C D15.C J1.1 J2.1 J3.1 J10.6 J10.9 J10.14 J10.20 J10.25 J10.30 J10.34 J10.39 J11.1 J11.3 J11.4 J12.3 J12.4 JS1.1 JS2.2 Q1.E Q2.2 R14.1 R27.2 R30.2 R36.1 R39.1 R42.1 SJ2.1 TP40.TP TP101.1 TP106.1 TP107.1 TP114.TP TP119.TP TP124.TP TP129.TP TP134.TP TP139.TP U1.1 U1.2 U1.3 U1.4 U2.2 U2.44 U3.2 U3.44 U4.2 U4.44 U5.2 U5.44 U6.2 U6.44 U7.2 U7.44 U8.2 U9.4 U10.12 U11.14 U12.2 U12.4 U14.2 U15.2 U16.2 U17.1 U17.7 U17.EP U18.2 U19.4 U20.4 U21.4 U22.1 U23.1 U24.1 U25.5 U26.5 U27.5 U28.5 W12.2
ID_SC: J10.28 R2.1 U1.6
ID_SD: J10.27 R3.1 U1.5
ISO_3V3_2: C33.1 C36.1 J7.4 R46.2 R49.2 U19.8 U22.4
ISO_3V3_3: C34.1 C37.1 J8.4 R47.2 R50.2 U20.8 U23.4
ISO_3V3_4: C35.1 C38.1 J9.4 R48.2 R51.2 U21.8 U24.4
ISO_GND_2: C33.2 C36.2 J7.3 U19.5 U22.3
ISO_GND_3: C34.2 C37.2 J8.3 U20.5 U23.3
ISO_GND_4: C35.2 C38.2 J9.3 U21.5 U24.3
ISO_SCL_2: J7.1 R49.1 U19.6
ISO_SCL_3: J8.1 R50.1 U20.6
ISO_SCL_4: J9.1 R51.1 U21.6
ISO_SDA_2: J7.2 R46.1 U19.7
ISO_SDA_3: J8.2 R47.1 U20.7
ISO_SDA_4: J9.2 R48.1 U21.7
LX: D1.+ L1.2 U2.1
LX_2: D4.+ L4.2 U5.1
LX_3: D2.+ L2.2 U3.1
LX_4: D5.+ L5.2 U6.1
LX_5: D3.+ L3.2 U4.1
LX_6: D6.+ L6.2 U7.1
MISO: J10.21
MOSI: J10.19
N$1: R54.2 U25.1
N$2: D15.A R67.1
N$3: R53.2 U25.2
N$4: D14.A R66.1
N$5: R52.2 U25.3
N$6: D8.3 R54.1
N$7: D8.2 R53.1
N$8: D8.1 R52.1
N$9: R63.2 U28.1
N$10: R62.2 U28.2
N$11: R61.2 U28.3
N$12: D12.A R64.1
N$13: D11.3 R63.1
N$14: D11.2 R62.1
N$15: D11.1 R61.1
N$16: R60.2 U27.1
N$17: R59.2 U27.2
N$18: R58.2 U27.3
N$19: D10.3 R60.1
N$20: D10.2 R59.1
N$21: D10.1 R58.1
N$22: R57.2 U26.1
N$23: R56.2 U26.2
N$24: R55.2 U26.3
N$25: D9.3 R57.1
N$26: D9.2 R56.1
N$27: D9.1 R55.1
N$29: LED13.A LED13.A@1 LED16.C LED16.C@1
N$31: LED16.A LED16.A@1 LED19.C LED19.C@1
N$32: LED19.A LED19.A@1 LED22.C LED22.C@1
N$33: LED14.A LED14.A@1 LED17.C LED17.C@1
N$34: LED17.A LED17.A@1 LED20.C LED20.C@1
N$35: LED20.A LED20.A@1 LED23.C LED23.C@1
N$36: LED15.A LED15.A@1 LED18.C LED18.C@1
N$37: LED18.A LED18.A@1 LED21.C LED21.C@1
N$38: R29.2 R30.1 U8.11
N$39: D13.A R65.1
N$40: R12.2 R14.2 U8.6
N$41: J10.1 J10.17
N$42: U17.4 U17.5
N$43: C43.1 R68.1 U17.2
N$46: LED21.A LED21.A@1 LED24.C LED24.C@1
N$47: LED1.A LED1.A@1 LED4.C LED4.C@1
N$48: LED4.A LED4.A@1 LED7.C LED7.C@1
N$75: R44.1 U12.5
N$77: JS1.2 R1.1 U1.7
N$81: LED7.A LED7.A@1 LED10.C LED10.C@1
N$82: LED2.A LED2.A@1 LED5.C LED5.C@1
N$83: LED5.A LED5.A@1 LED8.C LED8.C@1
N$84: LED8.A LED8.A@1 LED11.C LED11.C@1
N$85: LED3.A LED3.A@1 LED6.C LED6.C@1
N$159: LED6.A LED6.A@1 LED9.C LED9.C@1
N$160: LED9.A LED9.A@1 LED12.C LED12.C@1
PGND_2: J4.GND J7.6
PGND_3: J5.GND J8.6
PGND_4: J6.GND J9.6
PRB_2: J4.S J7.5
PRB_3: J5.S J8.5
PRB_4: J6.S J9.5
PUMP: U11.13 U12.3
PUMP_GND: Q2.3 W11.1
RESET1: R19.1 U10.3
RX: J10.10
SC0: R16.1 U10.5
SC1: R18.1 U8.1 U10.7 U25.6
SC2: R21.1 TP39.TP U10.9 U17.10 U18.6 U26.6
SC3: R23.1 U10.11 U11.16 U27.6
SC4: R25.1 U10.14 U28.6
SC5: J2.4 R31.1 U10.16
SC6: J3.4 R33.1 U10.18 U19.3 U20.3 U21.3
SC7: J1.4 R37.1 U10.20
SCK: J10.23
SCL: J10.5 R13.1 U10.22
SD0: R17.1 U10.4
SD1: R20.1 U8.16 U10.6 U25.7
SD2: R22.1 TP38.TP U10.8 U17.9 U18.1 U26.7
SD3: R24.1 U10.10 U11.15 U27.7
SD4: R28.1 U10.13 U28.7
SD5: J2.3 R32.1 U10.15
SD6: J3.3 R34.1 U10.17 U19.2 U20.2 U21.2
SD7: J1.3 R40.1 U10.19
SDA: J10.3 R15.1 U10.23
T1: LED1.THERM LED2.THERM LED3.THERM LED4.THERM LED5.THERM LED6.THERM LED7.THERM LED8.THERM LED9.THERM LED10.THERM LED11.THERM LED12.THERM LED13.THERM LED14.THERM LED15.THERM LED16.THERM LED17.THERM LED18.THERM LED19.THERM LED20.THERM LED21.THERM LED22.THERM LED23.THERM LED24.THERM
TACH: J12.2 R10.1 R12.1
TMPIN: U8.12 U9.1
TMPSTART: R26.2 R27.1 U8.13 U9.2
TX: J10.8
VSET: TP116.TP U2.3 U11.7
VSET_2: TP121.TP U5.3 U11.6
VSET_3: TP126.TP U3.3 U11.5
VSET_4: TP131.TP U6.3 U11.4
VSET_5: TP136.TP U4.3 U11.10
VSET_6: TP141.TP U7.3 U11.11

## Tracks (layer width: path | path; a pad name or v marks a point on that pad's centre or on a via)
24V_IN
  Top 2.54: F1.1 123.7,6.17 W12.1
!LDAC!
  Top 0.254: U11.1 212.07,148.16 TP104.1
+3V3  (via drill 0.35)
  Top 0.254: R37.2 R40.2 R33.2 R34.2 R31.2 R32.2 R25.2 R28.2 R23.2 R24.2 R21.2 R22.2 R18.2 R20.2 R16.2 R17.2 167.17,64.05 v167.13,64.08 | v109.35,236.42 v109.36,236.42 110.48,236.42 J2.2 | 61.98,32.97 56.64,32.97 | R45.1 83.57,24.84 82.8,25.6 82.8,26.85 U26.8 | v54.48,30.56 C39.2 | 130.5,69.23 130.5,69.27 130.11,69.65 130.11,72.32 131.43,73.63 | 123.95,129.24 124.95,130.23 137.39,130.23 142.88,124.75 142.88,80.13 141.56,78.82 136.61,78.82 131.43,73.63 | v130.94,74.12 131.43,73.63 | R1.2 191.94,22.23 U1.8 193.68,24.85 R2.2 | U21.1 30.1,5.41 | J3.2 98.92,236.94 v97.66,238.2 | v85.85,237.69 86.99,236.56 J1.2 | 176.45,230.54 175.99,230.54 C26.1 | v177.82,237.92 177.82,232.82 R68.2 | 173.52,230.16 173.52,218.31 TP41.TP
  Top 0.305: U10.24 185.1,43.9 185.1,44.39 | 185.1,44.39 R41.2 | R38.2 182.82,44.47 | 182.82,44.47 v182.74,44.39 | 185.1,44.39 v185.79,44.39 186.32,44.92 R13.2 R15.2 | R35.2 180.56,44.54 v180.71,44.39 | R19.2 177.79,46.3 v177.92,46.42 | C20.1 182.82,35.74 182.82,44.47 | U18.5 179.47,215.25 179.29,215.07 176.6,215.07 176.17,215.5 C25.1 174.99,217.6 174.39,218.2 TP41.TP | U11.3 208.87,147.9 | 208.87,147.9 208.87,149.3 C22.1 | C21.1 207.28,149.49 208.87,147.9 | U11.8 205.62,146.38 | U19.1 30.23,36.53 | U25.8 56.68,30.43 C39.2 56.55,32.88 56.64,32.97 | U27.8 73.45,30.3 C41.2 73.66,30.6 73.66,32.72 73.91,32.97 | C40.2 | C40.2 U26.8 | U28.8 65.32,30.43 C42.2 65.41,30.6 65.41,32.72 65.66,32.97 | R43.1 204.22,144.97 205.62,146.38 | v209.55,148.03 209.42,147.9 208.87,147.9 | 205.62,146.38 205.62,147.34 205.24,147.73 205.24,148.55 206.12,149.43 | 206.12,149.43 206.19,149.49 | C40.2 82.84,32.65 82.53,32.97 73.91,32.97 | 73.91,32.97 65.66,32.97 | R64.2 130.55,32.73 U16.3 135,33.86 135,40.97 v130.43,45.54 | 65.66,32.97 61.98,32.97 | R37.2 167.17,3.54 167.13,3.51 | U9.5 119.2,129.8 119.76,129.24 123.95,129.24 | 130.5,69.23 130.5,49.55 v130.43,49.48 | TP100.1 208.15,159.33 SJ1.1 205.87,158.83 v205.74,158.95 | v205.36,150.32 205.36,150.19 206.12,149.43 | R2.2 R3.2 | R11.2 v143.76,64.59 | R1.2 C1.1 183.13,15.45 183.13,3.51 | R68.2 178.25,232.39 U17.6 176.45,230.54 | C26.1 173.52,230.16
  Top 0.508: 206.19,149.49 C21.1
  Top 0.559: C30.1 43.98,39.03 44.58,38.43 46.99,38.43 U22.2 | C27.1 v29.68,35.98 30.23,36.53 | C31.1 43.98,23.91 44.58,23.32 46.99,23.32 U23.2 | C28.1 v29.68,20.87 30.23,21.41 | C32.1 43.85,7.91 44.45,7.32 46.35,7.32 U24.2 | C29.1 v29.55,4.86 30.1,5.41
  Top 0.61: U20.1 30.23,21.41 | v119.63,4.9 121.06,3.48 132.54,3.48 132.7,3.33 142.64,3.33 142.79,3.48 144.88,3.48 144.91,3.51 167.13,3.51 183.13,3.51 209.68,3.51 211.48,5.31 211.48,23.69 210.95,24.22 210.95,24.95 211.47,25.47 211.6,25.47 211.99,25.86 211.99,58.22 v211.97,58.24
  Bottom 0.254: v85.85,237.69 85.85,239.22 | v97.66,238.2 97.66,239.22 | v109.35,236.42 109.35,239.22 | v209.55,148.03 216.03,148.03 216.15,148.16 | 198.81,62.74 204.15,62.74 204.36,62.52 207.37,62.52 207.59,62.74 211.84,62.74 211.84,61.42 211.97,61.29 | 50.48,30.43 50.61,30.56 v54.48,30.56
  Bottom 0.305: v177.92,46.42 179.86,44.48 arc45 180.08,44.39 v180.71,44.39 v182.74,44.39 v185.79,44.39 185.79,49.72 198.81,62.74 | v130.43,49.48 v130.43,45.54 | v205.74,158.95 205.74,150.7 v205.36,150.32 | v143.76,64.59 142.37,64.59 140.59,66.37 140.59,72.09 138.56,74.12 v130.94,74.12
  Bottom 0.406: v177.82,237.92 177.82,239.22
  Bottom 0.559: U22.2 46.74,38.56 44.12,35.94 29.72,35.94 v29.68,35.98 | U23.2 46.74,23.44 44.12,20.83 29.72,20.83 v29.68,20.87 | U24.2 46.99,8.2 43.61,4.83 29.59,4.83 v29.55,4.86
  Bottom 0.61: 50.48,5.47 47.75,8.2 U24.2 | 50.48,5.47 50.48,23.32 | 50.48,23.32 50.48,30.43 50.48,37.86 49.78,38.56 46.74,38.56 | U23.2 50.35,23.44 50.48,23.32 | 50.48,5.47 51.51,4.45 117.33,4.45 | 117.33,4.45 119.18,4.45 v119.63,4.9 | v211.97,58.24 211.97,61.29 216.15,65.48 216.15,148.16 216.15,238.46 215.39,239.22 177.82,239.22 109.35,239.22 97.66,239.22 85.85,239.22 | U16.3 117.33,16.18 117.33,4.45
+5V  (via drill 0.35)
  Top 0.254: R26.1 135.51,60.95 R29.1 | U8.3 136.16,70.97 136.16,72.14 140.8,76.78 v142.62,76.78 | v210.95,68.91 210.95,61.29
  Top 0.305: R67.2 120.02,35.09 120.02,33.35 U15.3 | 135.51,60.95 138.22,58.24 144.09,58.24 144.09,48.54 143.23,47.68 122.17,47.68 112.93,38.43 v112.39,38.43 | J10.2 J10.4
  Top 0.406: D9.6 85.09,5.5 D9.5 D9.4 81.64,5.37 D10.6 D10.5 D10.4 D11.6 D11.5 D11.4 59.59,5.37 D8.6 D8.5 D8.4 | v200.41,8.84 J10.2 | v202.82,1.42 202.82,1.96
  Top 0.61: U15.3 118.11,31.06 115.32,28.27 115.32,5.54 | 210.95,61.29 212.85,59.39 212.85,4.65 210.16,1.96 202.82,1.96 118.01,1.96 115.32,4.65 115.32,5.54 | 115.32,5.54 115.28,5.5 85.09,5.5
  Bottom 0.254: v142.62,76.78 150.5,68.91 v210.95,68.91
  Bottom 0.305: v112.39,38.43 119.76,31.06 U15.3
  Bottom 0.406: v202.82,1.42 200.41,3.83 v200.41,8.84
+12V  (via drill 0.35)
  Top 0.254: R65.2 112.51,35.24 112.52,35.26 | J12.1 113.02,44.53 | 113.02,44.53 113.02,40.06 111.69,38.72 111.69,38.14 112.1,37.72 112.98,37.72 113.03,37.67 | D16.- 113.15,44.65 113.02,44.53
  Top 0.305: 46.94,234.75 19.47,234.75 W11.2 16.94,228.68 v19.56,228.68 | R10.2 105.31,35.24 R65.2 | J11.2 154.81,210.12 152.01,212.93 v148.46,212.93
  Top 0.406: v146.69,162.13 v146.69,189.69 | 46.94,234.75 46.94,235.5 U12.1 | U14.3 112.52,35.26 112.52,37.16 113.03,37.67 122.43,47.07 143.49,47.07 144.7,48.29 144.7,125.25 141.99,127.97 141.99,135.97 143.11,137.09 v143.11,139.52
  Bottom 0.305: v19.56,228.68 19.56,228.17 19.76,227.97 140.11,227.97 140.28,228.14 143.92,228.14 144.4,227.66 | 144.4,212.29 147.83,212.29 v148.46,212.93
  Bottom 0.406: v146.69,189.69 146.69,198.98 144.4,201.26 144.4,212.29 144.4,227.66 | v143.11,139.52 143.11,158.55 v146.69,162.13
+24V
  Top 0.254: TP133.TP 154.5,103.2 151.38,103.2
  Top 0.305: C2.1 196.02,140.9 195.91,141.02 | C11.1 179.39,140.9 179.27,141.02 | C3.1 195.26,110.55 195.15,110.67 | C12.1 178.88,110.81 178.76,110.92 | C4.1 163.26,110.81 163.14,110.92 | C13.1 163.13,139.51 163.01,139.62 | R9.2 160.78,137.11 160.78,134.32 160.02,133.55 | R6.2 160.4,106.5 160.15,106.25 160.15,104.34 161.16,103.33 161.29,103.2 | 176.91,133.68 177.04,133.55 | R66.2 150.39,35.49 150.5,35.38 150.85,35.38 150.98,35.51
  Top 0.61: D1.- 195.91,141.02 C5.1 194.02,141.02 193.8,141.24 193.8,139.33 R4.2 193.93,138.25 193.93,133.55 | D4.- 179.27,141.02 C14.1 177.38,141.02 177.16,141.24 177.16,139.33 R7.2 176.91,138.63 176.91,133.68 | D2.- 195.15,110.67 C6.1 193.25,110.67 193.04,110.88 193.04,108.98 R5.2 192.4,103.58 192.15,103.33 | D5.- 178.76,110.92 C15.1 176.87,110.92 176.66,111.14 176.66,109.24 R8.2 176.78,108.15 176.78,103.33 | R6.2 161.04,109.24 161.04,111.14 161.25,110.92 C7.1 163.14,110.92 D3.- | R9.2 160.91,137.94 160.91,139.84 161.12,139.62 C16.1 163.01,139.62 D6.- | C23.1 142.81,14.43 144.53,14.43 144.84,14.74 D7.C | C24.1 144.47,11.96 144.53,12.01
  Top 1.27: 144.53,21.28 144.59,21.35 139.95,25.98 U16.1 U15.1
  Top 2.54: 161.29,103.2 151.38,103.2 150.98,102.8 | 161.16,103.33 176.78,103.33 192.15,103.33 | 159.51,133.63 148.36,133.63 148.36,105.41 150.98,102.8 | 160.02,133.55 177.04,133.55 193.93,133.55 | F1.2 143.89,6.17 145.29,7.57 145.29,11.25 144.53,12.01 144.53,14.43 144.53,21.28 150.98,21.28 150.98,35.51 150.98,102.8
  Bottom 1.27: U14.1 U15.1
  pour Top (isolate 0.305, no thermals): 196.34,143.14 197.61,143.14 197.61,140.6 196.66,140.6 196.66,132.35 192.21,132.35 192.21,138.06 192.85,138.06 192.85,139.65 193.48,139.65 193.48,141.55 196.34,141.55
  pour Top (isolate 0.305, no thermals): 179.71,143.14 180.97,143.14 180.97,140.6 180.02,140.6 180.02,132.35 175.58,132.35 175.58,138.06 176.21,138.06 176.21,139.65 176.85,139.65 176.85,141.55 179.71,141.55
  pour Top (isolate 0.305, no thermals): 195.58,112.79 196.85,112.79 196.85,110.25 195.9,110.25 195.9,101.99 191.45,101.99 191.45,107.71 192.09,107.71 192.09,109.3 192.72,109.3 192.72,111.2 195.58,111.2
  pour Top (isolate 0.305, no thermals): 179.2,113.04 180.47,113.04 180.47,110.5 179.51,110.5 179.51,102.25 175.07,102.25 175.07,107.96 175.7,107.96 175.7,109.55 176.34,109.55 176.34,111.46 179.2,111.46
  pour Top (isolate 0.305, no thermals): 163.58,113.04 164.85,113.04 164.85,110.5 163.89,110.5 163.89,102.25 159.45,102.25 159.45,107.96 160.08,107.96 160.08,109.55 160.72,109.55 160.72,111.46 163.58,111.46
  pour Top (isolate 0.305, no thermals): 163.45,141.74 164.72,141.74 164.72,139.2 163.77,139.2 163.77,130.95 159.32,130.95 159.32,136.66 159.96,136.66 159.96,138.25 160.59,138.25 160.59,140.16 163.45,140.16
A0_EXT_1
  Top 0.305: R36.2 R35.1 179.86,47.22 arc45 179.64,47.13 179.28,46.77 arc45 179.19,46.55 179.19,44.08 U10.1
A1_EXT_1
  Top 0.305: R39.2 R38.1 182.12,47.2 arc45 181.9,47.1 181.82,47.02 arc45 181.73,46.8 181.73,43.25 arc-45 181.63,43.03 181.44,42.84 arc-45 181.22,42.74 U10.2
A2_EXT_1
  Top 0.305: R42.2 R41.1 184.41,47.2 arc45 184.19,47.1 184.11,47.02 arc45 184.01,46.8 184.01,41.76 arc90 184.33,41.44 U10.21
ADDR0
  Top 0.254: U11.2 209.52,147 210.26,147.74 210.26,152.3 210.31,152.35 210.31,156.41 209.42,157.3 SJ1.2
  Top 0.406: SJ1.2 SJ2.2
BUTTON  (via drill 0.35)
  Top 0.254: v211.84,24.59 212.17,24.26 212.17,4.93 209.88,2.64 119.02,2.64 v116.33,5.33 | v208.93,30.94 208.93,43.75 v208.91,43.76
  Top 0.305: v92.33,22.43 92.16,22.59 R45.2 92.11,24.89 A1.P$1 A1.P$2
  Bottom 0.254: v92.33,22.43 92.33,6.17 93.37,5.13 116.13,5.13 v116.33,5.33 | v211.84,24.59 208.93,27.49 v208.93,30.94 | v208.91,43.76 208.91,48.51 208.99,48.59 208.99,49.28 208.33,49.94 207.65,49.94 207.64,49.92 205.93,49.92 J10.29
CH1+  (via drill 0.35)
  Top 0.305: C8.2 187.75,141.34 | 187.75,141.34 187.45,141.05 187.45,139.78 188.47,138.76 191.01,138.76 R4.1 | 187.75,141.34 184.02,141.34 184.02,158.13 LSP1.MP 176.64,169.32 150.95,169.32 v150.88,169.24
  Top 0.61: R4.1 190.71,139.88 U2.4 188.89,141.17 C8.2
  Bottom 0.305: LED10.A@1 117.09,162.31 117.12,162.33 141.71,162.33 148.62,169.24 v150.88,169.24
  pour Top (isolate 0.305, rank 2): 190.94,141.55 190.94,139.65 191.9,139.65 191.9,136.16 184.53,136.16 184.53,142.51 187.45,142.51 188.09,141.87 189.04,141.87 189.04,141.55
CH1-  (via drill 0.35)
  Top 0.305: v33.15,61.04 v33.15,58.75 | 187.27,147.45 188.72,146 | L1.1 189.87,151.84 189.87,158.25 LSP2.MP 183.2,169.88 151.64,169.88 148.72,172.8 148.72,201.5 144.27,205.94 144.27,227.41 v140.59,227.41
  Top 0.61: 188.72,146 C8.1
  Bottom 0.305: LED1.C 33.27,61.16 v33.15,61.04 | v33.15,58.75 33.15,48.59 5.46,48.59 5.46,227.38 11.72,227.38 12.61,226.49 17.66,226.49 18.57,227.41 v140.59,227.41
  pour Top (isolate 0.305): 189.04,142.51 189.04,145.68 189.67,145.68 189.67,156.22 184.53,156.22 184.53,143.14 187.45,143.14 188.09,142.51
CH2+  (via drill 0.35)
  Top 0.305: C17.2 170.85,141.34 | 172.23,141.19 167.51,141.19 167.51,158.13 LSP7.MP 161.12,168.2 154.83,168.2 154.48,167.85 151.23,167.85 150.14,168.94 150.14,169.09 v148.59,170.64
  Top 0.61: R7.1 174.08,139.88 U5.4 172.25,141.17 172.23,141.19 C17.2
  Bottom 0.305: LED22.A 117.09,191.44 137.86,191.44 138.53,190.77 142.43,190.77 146.94,186.26 146.94,172.29 v148.59,170.64
  pour Top (isolate 0.305, rank 2): 174.31,141.55 174.31,139.65 175.26,139.65 175.26,136.16 168.15,136.16 168.15,142.51 170.81,142.51 171.45,141.87 172.4,141.87 172.4,141.55
CH2-  (via drill 0.35)
  Top 0.305: v32.13,223.6 v34.92,223.6 | L4.1 173.48,151.71 173.48,158 LSP8.MP 167.55,168.76 154.35,168.76 v154.18,168.58 | v147.87,196.8 v145.03,196.8
  Bottom 0.305: LED13.C 33.27,110.34 33.4,110.21 7.24,110.21 7.24,224.36 32.13,224.36 v32.13,223.6 | v34.92,223.6 35.28,223.6 38.48,226.8 140.16,226.8 140.28,226.67 140.89,226.67 141.02,226.8 143.36,226.8 143.76,226.39 143.76,196.8 v145.03,196.8 | v154.18,168.58 147.87,174.89 v147.87,196.8
  pour Top (isolate 0.305): 172.4,142.51 172.4,145.68 173.04,145.68 173.04,156.1 168.15,156.1 168.15,143.14 170.81,143.14 171.45,142.51
CH3+  (via drill 0.35)
  Top 0.305: C9.2 187.96,110.95 183.51,110.95 183.51,128.03 LSP3.MP | v184.53,105.61 184.53,109.11 TP125.TP
  Top 0.61: R5.1 189.95,109.53 U3.4 188.12,110.82 C9.2
  Bottom 0.254: 118.09,77.98 118.14,77.98
  Bottom 0.305: LED11.A@1 117.09,76.99 118.09,77.98 | 118.14,77.98 127.05,77.98 127.13,78.05 142.72,78.05 151.31,86.64 151.31,97.25 154.46,100.41 183.51,100.41 184.53,101.42 v184.53,105.61
  pour Top (isolate 0.305, rank 2): 190.18,111.2 190.18,109.3 191.13,109.3 191.13,105.8 184.02,105.8 184.02,112.15 186.69,112.15 187.32,111.52 188.28,111.52 188.28,111.2
CH3-  (via drill 0.35)
  Top 0.305: v33.4,165.94 42.71,165.94 44.36,167.59 142.24,167.59 143,166.83 143,159.59 145.41,157.18 v145.41,139.01 | L2.1 188.98,121.62 188.98,128.03 LSP4.MP 194.31,128.11 190.72,131.7 v151.64,131.7
  Bottom 0.305: LED2.C@1 33.27,165.94 v33.4,165.94 | v151.64,131.7 145.41,137.93 v145.41,139.01
  pour Top (isolate 0.305): 188.28,112.15 188.28,115.33 188.91,115.33 188.91,125.87 184.02,125.87 184.02,112.79 186.69,112.79 187.32,112.15
CH4+  (via drill 0.35)
  Top 0.305: 171.58,111.07 C18.2 171.11,111.24 170.31,110.44 v170.31,110.19 | v144.5,194.51 144.62,194.39 144.62,163.22 v144.65,163.19 145.95,161.89 145.95,161.82 146.38,161.39 146.45,161.39 146.91,160.93 v146.91,137.87 | LSP9.MP 168.97,126.31 168.4,126.31 168.15,126.06 168.15,112.22 v168.05,112.22
  Top 0.61: R8.1 173.57,109.78 U6.4 171.74,111.08 C18.2
  Bottom 0.305: LED23.A 117.09,225.4 117.93,226.24 139.93,226.24 140.05,226.11 142.59,226.11 142.7,226.01 142.7,195.43 143.61,194.51 v144.5,194.51 | v146.91,137.87 153.01,131.78 166.69,131.78 LSP9.MP | v168.05,112.22 170.08,110.19 v170.31,110.19
  pour Top (isolate 0.305, rank 2): 173.8,111.46 173.8,109.55 174.75,109.55 174.75,106.06 168.66,106.06 168.66,112.41 170.31,112.41 170.94,111.77 171.89,111.77 171.89,111.46
CH4-  (via drill 0.35)
  Top 0.305: v44.32,82.63 46.08,82.63 v46.61,82.1 | v101.47,81.61 v104.52,81.61 | v116.2,78.82 v118.49,78.82 | v73.53,82.63 74.21,82.63 74.84,83.26 75.53,83.26 75.91,82.88 v77.85,82.88 | L5.1 172.72,121.49 172.72,127.9 LSP10.MP 174.79,130.66 153.16,130.66 v153.16,130.48 | v168.78,105.36 168.78,113.49 169.16,113.87 170.65,113.87 C18.1
  Bottom 0.305: LED14.C 33.27,82.4 33.4,82.27 43.97,82.27 v44.32,82.63 | v46.61,82.1 60.79,82.1 60.96,82.27 73.18,82.27 v73.53,82.63 | v77.85,82.88 78.56,83.59 86.79,83.59 89.38,81 100.86,81 v101.47,81.61 | v104.52,81.61 104.29,81.38 104.29,78.46 115.85,78.46 v116.2,78.82 | v118.49,78.82 142.62,78.82 150.75,86.94 150.75,97.49 154.31,101.04 166.75,101.04 168.78,103.07 v168.78,105.36 | v153.16,130.48 152.42,129.74 147.7,129.74 v146.18,131.27
  pour Top (isolate 0.305): 171.89,112.41 171.89,115.58 172.53,115.58 172.53,125.74 168.53,125.74 168.53,113.04 170.31,113.04 170.94,112.41
CH5+  (via drill 0.35)
  Top 0.305: 152.53,114.12 152.53,111.2 155.96,111.2 C10.2 | 152.53,114.12 152.53,127.08 154.69,127.08 LSP5.MP 150.81,128.28 v150.5,128.6 | v143.01,135.45 143.41,135.84 v144.91,135.84 144.78,135.71 144.78,135.35 145.51,134.62 145.51,134.01 144.78,133.28 v144.78,129.24 | v151.89,114.12 152.53,114.12
  Top 0.61: R6.1 157.95,109.78 U4.4 156.12,111.08 C10.2
  Bottom 0.305: LED12.A 117.09,136.91 117.07,136.93 136.49,136.93 138.53,134.89 142.41,134.89 142.57,135.05 142.62,135.05 v143.01,135.45 | v150.5,128.6 145.41,128.6 v144.78,129.24
  pour Top (isolate 0.305, rank 2): 158.18,111.46 158.18,109.55 159.13,109.55 159.13,106.06 153.16,106.06 153.16,112.41 154.69,112.41 155.32,111.77 156.27,111.77 156.27,111.46
CH5-  (via drill 0.35)
  Top 0.305: v117.98,134.95 84.23,134.95 78.74,129.46 71.63,129.46 66.9,134.19 66.9,137.24 65.63,138.51 v33.4,138.51 | L3.1 156.84,121.49 156.84,128.16 LSP6.MP 159.73,130.1 153.82,130.1 153.47,129.75 151.63,129.75 v150.75,130.63 | v142.88,134.32 v144.78,134.32 | v154.56,114 155.61,112.94 C10.1
  Bottom 0.305: v117.98,134.95 119.36,136.32 136.24,136.32 138.28,134.28 142.84,134.28 v142.88,134.32 | v33.4,138.51 33.4,150.09 LED3.C | v144.78,134.32 147.07,134.32 v150.75,130.63
  pour Top (isolate 0.305): 156.27,112.41 156.27,115.58 156.91,115.58 156.91,125.74 153.16,125.74 153.16,113.04 154.69,113.04 155.32,112.41
CH6+  (via drill 0.35)
  Top 0.305: LSP11.MP 151.64,158.25 151.64,140.03 | C19.2 155.83,139.78 151.89,139.78 151.64,140.03 | v150.75,140.03 151.64,140.03
  Top 0.61: R9.1 157.82,138.49 U7.4 155.99,139.78 C19.2
  Bottom 0.305: LED24.A 117.09,108.94 117.04,108.99 143.61,108.99 143.84,109.22 143.84,140.03 v150.75,140.03
  pour Top (isolate 0.305, rank 2): 158.05,140.16 158.05,138.25 159,138.25 159,134.76 153.03,134.76 153.03,141.11 154.56,141.11 155.19,140.47 156.15,140.47 156.15,140.16
CH6-  (via drill 0.35)
  Top 0.305: LSP12.MP 157.1,158.13 157.1,151.59 L6.1 | v144.65,142.82 142.23,140.4 138.53,140.4 136.92,138.78 136.92,136.5 136.38,135.97 103,135.97 102.59,135.56 84.2,135.56 83.69,136.07 83.69,139.78 77.37,146.1 v77.37,146.25
  Bottom 0.305: LED15.C@1 33.27,194.06 33.3,194.03 72.41,194.03 72.66,194.28 73.35,194.28 74.02,193.61 74.02,191.55 73.2,190.73 73.2,166.32 73.56,165.97 73.56,152.95 77.45,149.06 77.45,147.18 77.37,147.1 v77.37,146.25 | v144.65,142.82 154.05,142.82 v154.18,142.95
  pour Top (isolate 0.305): 156.15,141.11 156.15,144.28 156.78,144.28 156.78,155.84 152.91,155.84 152.91,141.74 154.56,141.74 155.19,141.11
DAC_!CLR!
  Top 0.305: U11.9 204.54,141.49 | TP105.1 204.54,141.49 | R43.2 204.54,142.36 204.54,141.49
F1_PWM
  Top 0.305: Q1.B 140.88,63.81 140.88,64.47 | 140.88,64.47 R11.1 | U8.15 136.72,64.4 136.78,64.34 140.75,64.34 140.88,64.47
FAN_NEG  (via drill 0.35)
  Top 0.254: D16.+ 117.12,51.36 116.97,51.51
  Top 0.305: v141.99,57.35 141.99,49.1 141.22,48.34 122.43,48.34 119.25,51.51 116.97,51.51 113.28,51.51 110.52,48.75 J12.5 110.52,46.21 109.6,45.29 107.26,45.29 JS2.1 | v142.88,59.64 141.9,59.64 Q1.C
  Bottom 0.305: v141.99,57.35 141.99,58.75 v142.88,59.64
GATE
  Top 0.406: R44.2 37.4,237.91 Q2.1
GND  (via drill 0.25, 0.35)  (1 unrouted)
  Top 0.254: R30.2 134.66,58.62 v135.38,58.62 | v139.06,59.51 138.68,59.89 R27.2 139.72,60.95 Q1.E | U8.2 136.72,68.85 137.54,68.02 138.68,68.02 139.19,67.51 v139.19,67.39 | U18.2 179.47,221.63 179.6,221.77
  Top 0.305: C20.2 179.86,36.23 U10.12 | R36.1 R39.1 R42.1 | 58.67,26.42 U25.5 | C41.1 | 84.8,30.3 C40.1 | 67.27,30.43 C42.1 | U9.4 120.49,133.21 | J12.4 107.97,47.3 108.41,46.86 | J12.3 115.57,47.07 | U17.7 178.7,229.94 U17.EP
  Top 0.406: C5.2 192.59,142.72 U2.44 192.21,144.41 | C14.2 175.95,142.72 U5.44 175.58,144.41 | C6.2 191.82,112.37 U3.44 | C15.2 175.44,112.62 U6.44 175.07,114.31 | C7.2 159.82,112.62 U4.44 | C16.2 159.69,141.32 U7.44 159.32,143.01 | 120.49,133.21 138.77,133.21 140.34,131.65 v140.34,131.52 | v143,128.85 143.26,128.85 145.29,126.82
  Bottom 0.254: v135.38,58.62 138.18,58.62 v139.06,59.51 | v139.06,59.51 139.95,59.51 141.35,60.91 v145.92,60.91 | v139.19,67.39 139.19,59.64 v139.06,59.51
  Bottom 0.406: v140.34,131.52 v143,128.85